# Altium PCB Source_Selector_V3.PcbDoc
Units mm, origin at the board's own origin, x right, y up, seen from the top; angles counter-clockwise.
Board outline 86.21 x 38.86 mm, 4 copper layers (Top Layer, GND, Signal, Bottom Layer), stack 1.954 mm thick; 67 components, 43 nets, 219 pads, 36 vias.
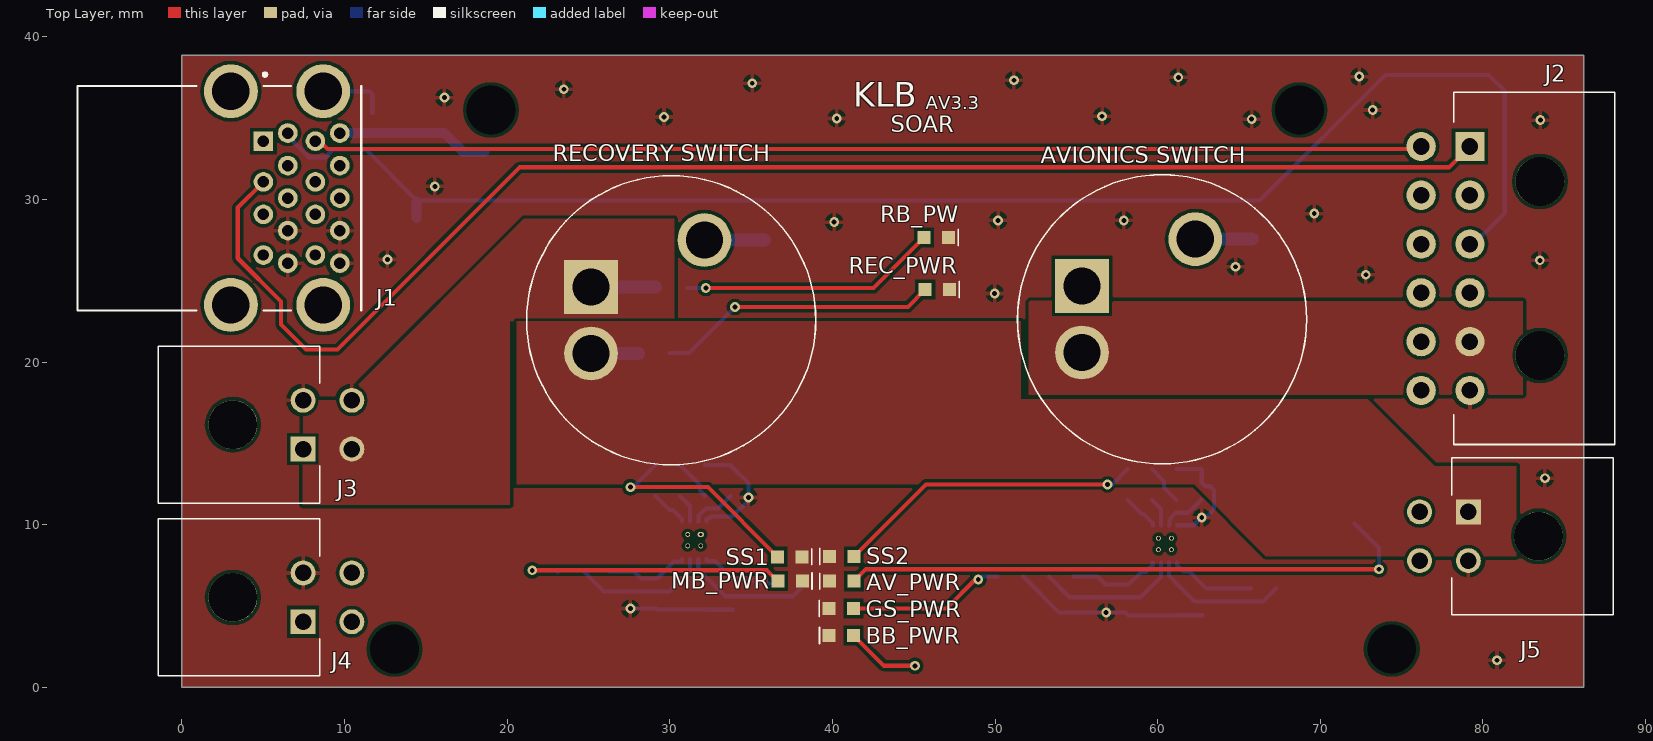
[diagram p0: Top Layer view]
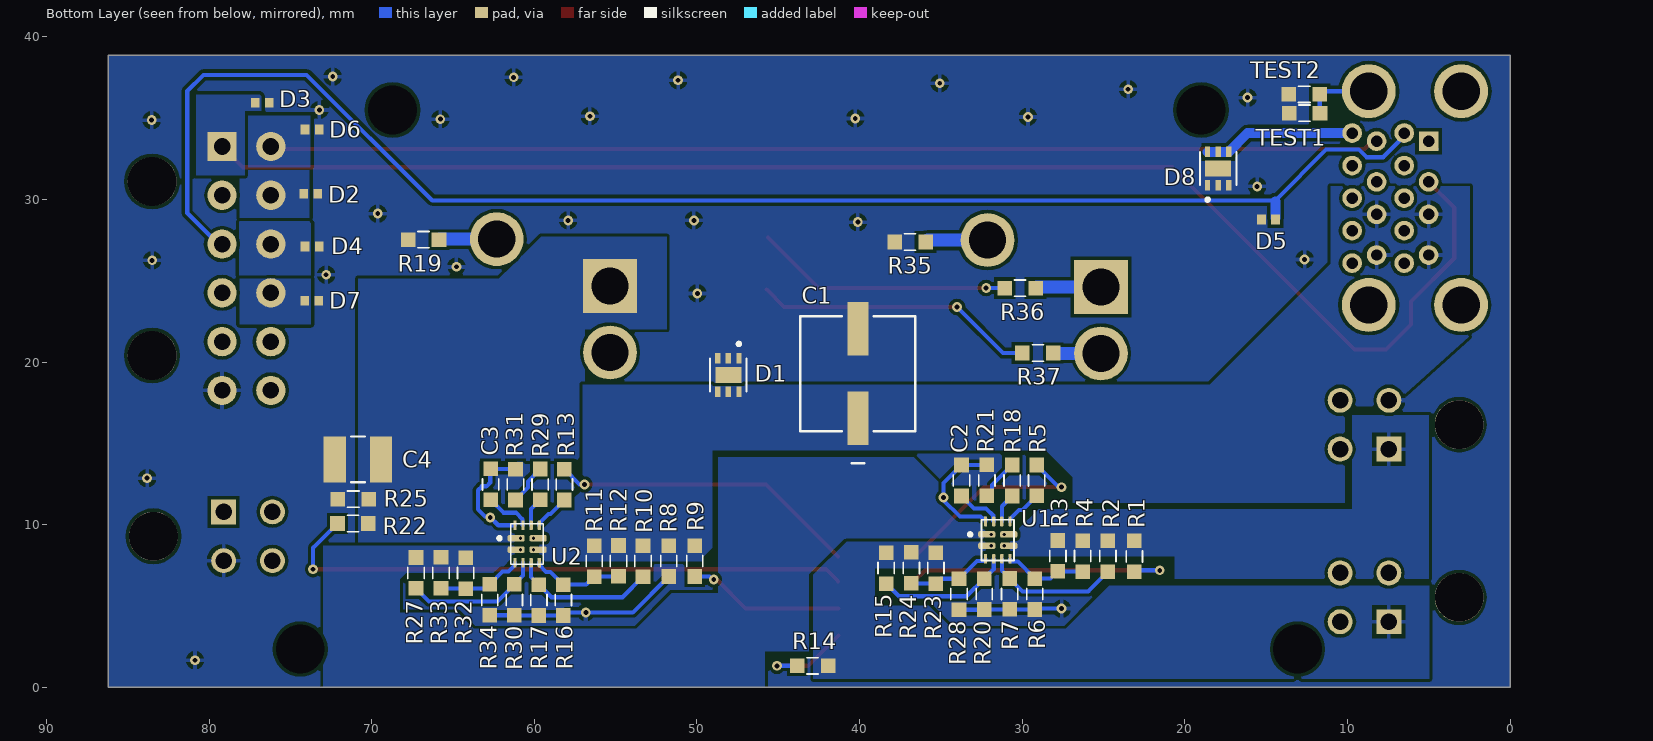
[diagram p1: Bottom Layer view, seen from below]
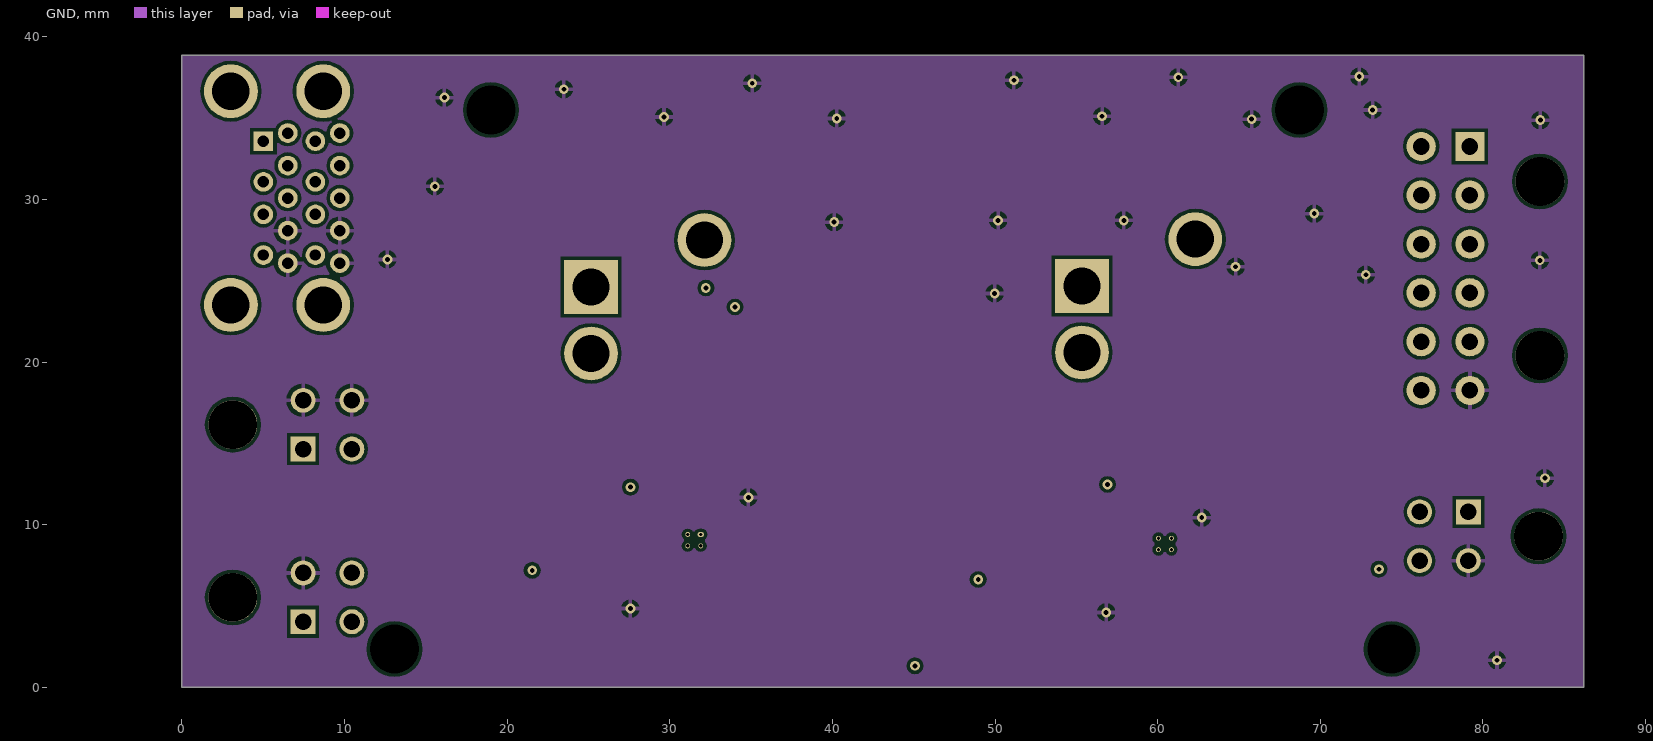
[diagram p2: GND]
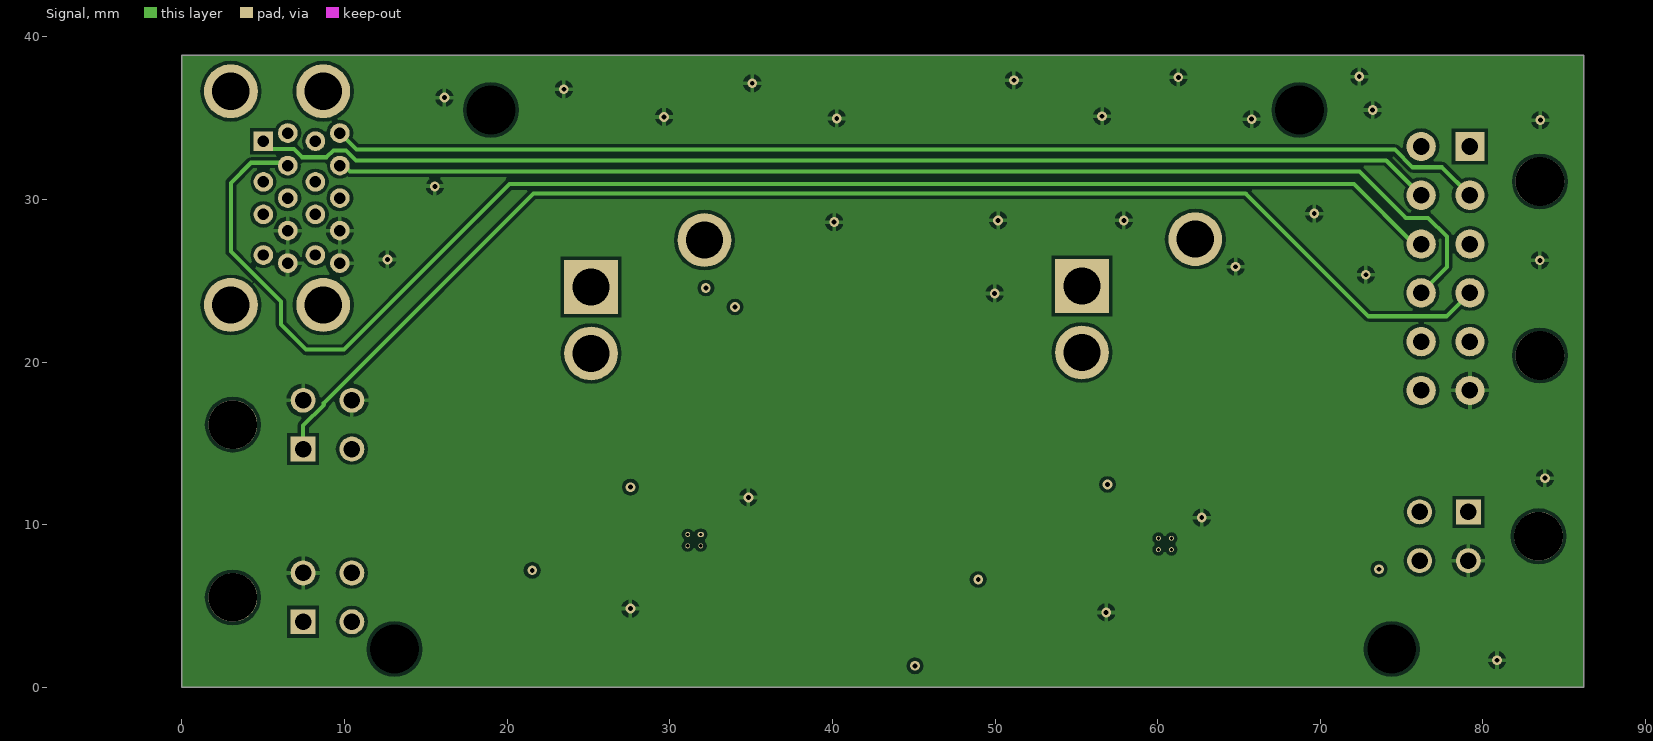
[diagram p3: Signal]
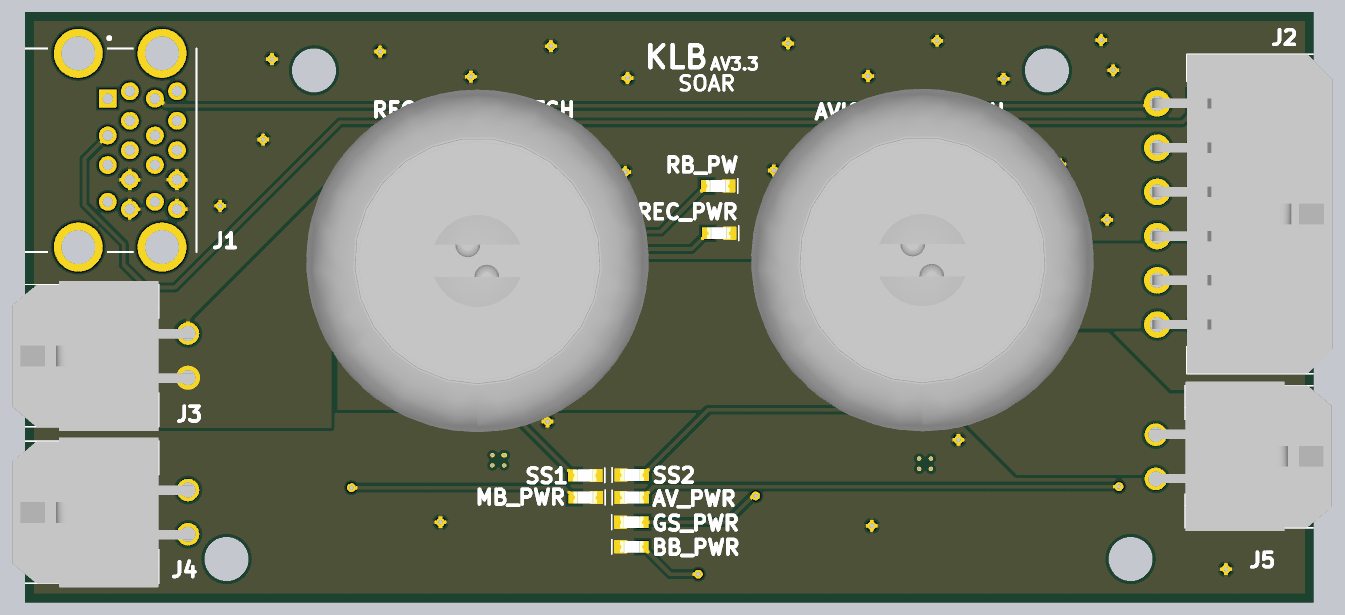
[diagram p4: 3D render of the assembled board from above, using the file's embedded part models]
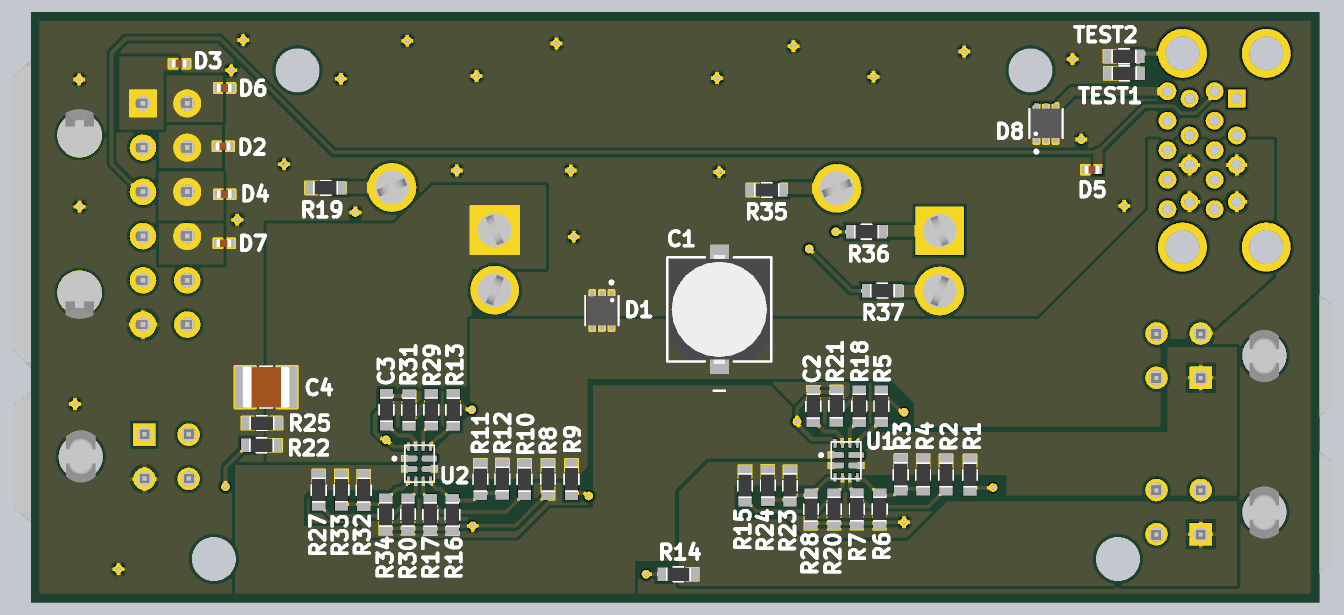
[diagram p5: 3D render of the assembled board from below, using the file's embedded part models]

## Layer stack, top to bottom
Top Solder: solder mask 0.01, Solder Resist, Dk 3.5
Top Layer: signal copper 0.071
Dielectric 2: prepreg 0.071, PP-006, Dk 4.1
GND: signal copper 0.035
Dielectric 1: dielectric 1.6, FR-4, Dk 4.8
Signal: signal copper 0.035
Dielectric 3: prepreg 0.071, PP-006, Dk 4.1
Bottom Layer: signal copper 0.071
Bottom Solder: solder mask 0.01, Solder Resist, Dk 3.5

## Board outline
0,0 0,38.862 86.208,38.862 86.208,0

## Design rules (kind name [scope] priority, off if disabled: settings)
Clearance [All] p1: gap=0.204 ignorepadtopadclearanceinfootprint=TRUE
DiffPairsRouting [All] p1: maxlimit=0.254 minlimit=0.254 mostfreqgap=0.254 toplayer_minwidth=0.381 toplayer_maxwidth=0.381 toplayer_prefwidth=0.381 midlayer1_minwidth=0.381 midlayer1_maxwidth=0.381 midlayer1_prefwidth=0.381 midlayer2_minwidth=0.381 midlayer2_maxwidth=0.381 midlayer2_prefwidth=0.381 bottomlayer_minwidth=0.381 bottomlayer_maxwidth=0.381 bottomlayer_prefwidth=0.381 substack1={DE8956C6-F9BE-4731-8523-C3B132525F0B} toplayer_{de8956c6-f9be-4731-8523-c3b132525f0b}_minwidth=0.381 toplayer_{de8956c6-f9be-4731-8523-c3b132525f0b}_maxwidth=0.381 toplayer_{de8956c6-f9be-4731-8523-c3b132525f0b}_prefwidth=0.381 midlayer1_{de8956c6-f9be-4731-8523-c3b132525f0b}_minwidth=0.381 midlayer1_{de8956c6-f9be-4731-8523-c3b132525f0b}_maxwidth=0.381 midlayer1_{de8956c6-f9be-4731-8523-c3b132525f0b}_prefwidth=0.381 midlayer2_{de8956c6-f9be-4731-8523-c3b132525f0b}_minwidth=0.381 midlayer2_{de8956c6-f9be-4731-8523-c3b132525f0b}_maxwidth=0.381 midlayer2_{de8956c6-f9be-4731-8523-c3b132525f0b}_prefwidth=0.381 bottomlayer_{de8956c6-f9be-4731-8523-c3b132525f0b}_minwidth=0.381 bottomlayer_{de8956c6-f9be-4731-8523-c3b132525f0b}_maxwidth=0.381 bottomlayer_{de8956c6-f9be-4731-8523-c3b132525f0b}_prefwidth=0.381 maxuncoupledlength=12.7
Height [All] p1: minheight=0 maxheight=40 prefheight=4
PolygonConnect [All] p1: thpad.connectstyle=Relief thpad.reliefconductorwidth=0.254 thpad.reliefentries=4 thpad.polygonreliefangle="90 Angle" thpad.airgapwidth=0.254 smdpad.connectstyle=Direct smdpad.reliefconductorwidth=0.254 smdpad.reliefentries=4 smdpad.polygonreliefangle="90 Angle" smdpad.airgapwidth=0.254 via.connectstyle=Relief via.reliefconductorwidth=0.254 via.reliefentries=4 via.polygonreliefangle="90 Angle" via.airgapwidth=0.254
RoutingVias [All] p1: holewidth=0.711 width=1.27 viastyle="Through Hole" minholewidth=0.711 minwidth=1.27 maxholewidth=0.711 maxwidth=1.27
SolderMaskExpansion [All] p1: expansion=0.102 istentingtop=FALSE
Width [All] p1: maxlimit=1 minlimit=0.204 preferedwidth=0.254 substack1={DE8956C6-F9BE-4731-8523-C3B132525F0B} toplayer_{de8956c6-f9be-4731-8523-c3b132525f0b}_minwidth=0.15 toplayer_{de8956c6-f9be-4731-8523-c3b132525f0b}_maxwidth=0.254 midlayer1_{de8956c6-f9be-4731-8523-c3b132525f0b}_minwidth=0.15 midlayer1_{de8956c6-f9be-4731-8523-c3b132525f0b}_maxwidth=0.254 midlayer2_{de8956c6-f9be-4731-8523-c3b132525f0b}_minwidth=0.15 midlayer2_{de8956c6-f9be-4731-8523-c3b132525f0b}_maxwidth=0.254 bottomlayer_{de8956c6-f9be-4731-8523-c3b132525f0b}_minwidth=0.15 bottomlayer_{de8956c6-f9be-4731-8523-c3b132525f0b}_maxwidth=0.254
28 further rules are at their usual default settings.

## Classes and differential pairs
component class Source_Selector: J1 J2 J3 J4 J5

## Components (designator, comment, footprint, x,y, rotation, side; value= is the part's Value field where it differs from the comment)
AV_PWR "LTST-C191KGKT" LTST-C191KGKT 40.569,6.525 r0 top
"AVIONICS SWITCH" "Y101132C203NQ" Y101132C203NQ 60.27,22.631 r0 top (schematic designator SW1)
BB_PWR "LTST-C191KGKT" LTST-C191KGKT 40.551,3.185 r0 top
C1 "UZG1E330MCL1GB" PCAP_6.3x3-ELECT_NCA-M 40.107,19.286 r90 bottom
C2 "04025A101JAT2A" 0603[1608] 33.733,12.717 r270 bottom
C3 "04025A101JAT2A" 0603[1608] 62.688,12.484 r270 bottom
C4 "EMK325ABJ107MM-P" CAPC3225X280N 70.846,14.011 r180 bottom
D1 "TVS1800DRVR" TVS1800DRVR 48.069,19.205 r270 bottom
D2 "D15V0H1U2LP-7B" 04025A101JAT2A 73.748,30.348 r180 bottom
D3 "D15V0H1U2LP-7B" 04025A101JAT2A 76.728,35.95 r180 bottom
D4 "D15V0H1U2LP-7B" 04025A101JAT2A 73.66,27.1 r180 bottom
D5 "D15V0H1U2LP-7B" 04025A101JAT2A 14.851,28.762 r0 bottom
D6 "D15V0H1U2LP-7B" 04025A101JAT2A 73.66,34.305 r180 bottom
D7 "D15V0H1U2LP-7B" 04025A101JAT2A 73.684,23.771 r180 bottom
D8 "TVS1800DRVR" TVS1800DRVR 17.949,31.9 r90 bottom
GS_PWR "LTST-C191KGKT" LTST-C191KGKT 40.541,4.854 r0 top
J1 "0484060003" MOLEX_0484060003 6.359,30.082 r270 top
J2 "10132449-1221GLF" 10132449-1221GLF 79.849,25.757 r90 top
J3 "0430450400" 0430450400 6.792,16.15 r270 top
J4 "0430450400" 0430450400 6.792,5.533 r270 top
J5 "0430450400" 0430450400 79.763,9.289 r90 top
MB_PWR "LTST-C191KGKT" LTST-C191KGKT 37.396,6.528 r180 top
R1 "ERA-3AEB2491V" 0603[1608] 23.106,8.057 r90 bottom
R2 "RMCF0603FT29K4" 0603[1608] 24.73,8.064 r90 bottom
R3 "RNCF0603BTC20K0" 0603[1608] 27.806,8.079 r90 bottom
R4 "RMCF0603FT665K" 0603[1608] 26.282,8.064 r90 bottom
R5 "CRGCQ0603F180R" 0603[1608] 29.115,12.72 r270 bottom
R6 "RT0603BRD075K11L" 0603[1608] 29.229,5.735 r90 bottom
R7 "RQ73C1J2K1BTD" 0603[1608] 30.776,5.745 r90 bottom
R8 "RT0603BRD0724KL" 0603[1608] 51.732,7.765 r90 bottom
R9 "ERA-3AEB2491V" 0603[1608] 50.135,7.765 r90 bottom
R10 "RMCF0603FT29K4" 0603[1608] 53.315,7.759 r90 bottom
R11 "RNCF0603BTC20K0" 0603[1608] 56.315,7.759 r90 bottom
R12 "RMCF0603FT665K" 0603[1608] 54.822,7.774 r90 bottom
R13 "CRGCQ0603F180R" 0603[1608] 58.154,12.471 r270 bottom
R14 "ERA-3AEB2491V" 0603[1608] 42.885,1.323 r180 bottom
R15 "RMCF0603FT29K4" 0603[1608] 38.364,7.328 r90 bottom
R16 "RT0603BRD075K11L" 0603[1608] 58.213,5.369 r90 bottom
R17 "RQ73C1J2K1BTD" 0603[1608] 59.717,5.369 r90 bottom
R18 "RT0603BRE0718KL" 0603[1608] 30.619,12.717 r270 bottom
R19 "CPF0603B510KE1" 0603[1608] 66.812,27.529 r180 bottom
R20 "RQ73C1J2K1BTD" 0603[1608] 32.33,5.732 r90 bottom
R21 "RT0603BRD075K11L" 0603[1608] 32.176,12.732 r270 bottom
R22 "ERA-3AEB2491V" 0603[1608] 71.156,10.076 r180 bottom
R23 "RT0603BRD0724KL" 0603[1608] 35.304,7.33 r90 bottom
R24 "CPF0603B510KE1" 0603[1608] 36.813,7.348 r90 bottom
R25 "RT0603BRD0724KL" 0603[1608] 71.133,11.572 r180 bottom
R27 "RMCF0603FT29K4" 0603[1608] 67.274,7.033 r90 bottom
R28 "RT0603BRD075K11L" 0603[1608] 33.89,5.725 r90 bottom
R29 "RT0603BRE0718KL" 0603[1608] 59.64,12.476 r270 bottom
R30 "RQ73C1J2K1BTD" 0603[1608] 61.228,5.384 r90 bottom
R31 "RT0603BRD075K11L" 0603[1608] 61.157,12.468 r270 bottom
R32 "RT0603BRD0724KL" 0603[1608] 64.225,7.017 r90 bottom
R33 "CPF0603B510KE1" 0603[1608] 65.741,7.042 r90 bottom
R34 "RT0603BRD075K11L" 0603[1608] 62.737,5.384 r90 bottom
R35 "CPF0603B510KE1" 0603[1608] 36.888,27.386 r180 bottom
R36 "MCT06030C1301FP500" 0603[1608] 30.124,24.547 r180 bottom
R37 "MCT06030C1301FP500" 0603[1608] 29.042,20.559 r180 bottom
RB_PW "LTST-C191KGKT" LTST-C191KGKT 46.383,27.663 r180 top
REC_PWR "LTST-C191KGKT" LTST-C191KGKT 46.454,24.453 r180 top
"RECOVERY SWITCH" "Y101132C203NQ" Y101132C203NQ 30.087,22.573 r0 top (schematic designator SW2)
SS1 "LTST-C191KGKT" LTST-C191KGKT 37.376,8.026 r180 top
SS2 "LTST-C191KGKT" LTST-C191KGKT 40.569,8.054 r0 top
TEST1 "RQ73C1J2K1BTD" 0603[1608] 12.638,35.306 r180 bottom
TEST2 "RQ73C1J2K1BTD" 0603[1608] 12.657,36.461 r180 bottom
U1 "TPS2121RUXR" IC_TPS2121RUXR#1 31.502,9.049 r180 bottom
U2 "TPS2121RUXR" IC_TPS2121RUXR#2 60.443,8.816 r180 bottom

## Footprints (in the part's own frame and the unit in brackets; to place one, negate y for a bottom-side part, rotate by r counter-clockwise, add the part's x,y. Pads: shape width x height; smd on the part's side, far side on the other; paste and mask are expansions set on the pad)
0603[1608] [mm]
  rect 0.9x0.9 smd mask+0.05: 1(-0.95,0) 2(0.95,0)
  silkscreen extent -0.35,-0.5 0.35,0.5, body extent -0.85,-0.45 0.85,0.45, height 0.55
04025A101JAT2A [mm]
  rect 0.54x0.6 smd: 1(-0.432,0) 2(0.432,0)
  body extent -0.53,-0.27 0.47,0.28, height 0.48
10132449-1221GLF [mm] "CONN HEADER R/A 12POS 3MM"
  rect 1.8x1.8 hole 1.02 mask+0.05: 1(7.5,0.65)
  round 1.8 hole 1.02 mask+0.05: 2(7.5,3.65) 3(4.5,0.65) 4(4.5,3.65) 5(1.5,0.65) 6(1.5,3.65) 7(-1.5,0.65) 8(-1.5,3.65) 9(-4.5,0.65) 10(-4.5,3.65) 11(-7.5,0.65) 12(-7.5,3.65)
  round 3 hole 3 mask+0.05: ""(-5.35,-3.65) ""(5.35,-3.65)
  silkscreen extent -10.82,-8.25 10.82,1.65, body extent -10.82,-8.25 10.83,3.97, height 8.78
0430450400 [mm] "4-Pin Molex 3.00mm Pitch"
  round 3 hole 3 unplated mask+0.05: 0(0,-3.66)
  rect 1.53x1.53 hole 1.02 mask+0.05: 1(1.5,0.66)
  round 1.53 hole 1.02 mask+0.05: 2(-1.5,0.66) 3(1.5,3.66) 4(-1.5,3.66)
  silkscreen extent -4.82,-8.25 4.83,1.67, body extent -5.05,-8.25 5.1,3.99, height 8.83
CAPC3225X280N [mm]
  rect 1.37x2.81 smd: 1(-1.42,0) 2(1.42,0)
  silkscreen extent -0.42,-1.4 0.42,1.4, body extent -1.6,-1.4 1.6,1.4, height 2.5
IC_TPS2121RUXR#1 [mm]
  rrect50% 1.05x0.4 smd mask+0: 1(-0.675,0.35) 2(-0.675,-0.35) 7(0.675,-0.35) 8(0.675,0.35)
  oval 0.4x0.3 hole 0.2 mask+0: 1_1(-0.4,0.35)
  round 0.3 hole 0.2 mask+0: 2_1(-0.4,-0.35) 7_1(0.4,-0.35) 8_1(0.4,0.35)
  rrect50% 0.2x0.6 smd mask+0: 3(-0.75,-1.15) 4(-0.25,-1.15) 5(0.25,-1.15) 6(0.75,-1.15) 9(0.75,1.15) 10(0.25,1.15) 11(-0.25,1.15) 12(-0.75,1.15)
  silkscreen extent -1.8,-1.25 1,1.25, body extent -1,-1.25 1,1.25, height 1
IC_TPS2121RUXR#2 [mm]
  rrect50% 1.05x0.4 smd mask+0: 1(-0.675,0.35) 2(-0.675,-0.35) 7(0.675,-0.35) 8(0.675,0.35)
  round 0.3 hole 0.2 mask+0: 1_1(-0.4,0.35) 2_1(-0.4,-0.35) 7_1(0.4,-0.35) 8_1(0.4,0.35)
  rrect50% 0.2x0.6 smd mask+0: 3(-0.75,-1.15) 4(-0.25,-1.15) 5(0.25,-1.15) 6(0.75,-1.15) 9(0.75,1.15) 10(0.25,1.15) 11(-0.25,1.15) 12(-0.75,1.15)
  silkscreen extent -1.8,-1.25 1,1.25, body extent -1,-1.25 1,1.25, height 1
LTST-C191KGKT [mm] "Green 571nm LED Indication - Discrete 2V 0603"
  rect 0.8x0.8 smd paste-3 mask+0.05: 1(-0.75,0) 2(0.75,0)
  silkscreen extent -1.35,-0.5 -1.35,0.5, body extent -0.8,-0.4 0.8,0.4, height 0.8
MOLEX_0484060003 [mm]
  rect 1.208x1.208 hole 0.7: 1(-3.5,-1.35)
  round 1.208 hole 0.7: 2(-1,-1.35) 3(1,-1.35) 4(3.5,-1.35) 5(4,0.15) 6(2,0.15) 7(0,0.15) 8(-2,0.15) 9(-4,0.15) 10(-3.5,1.85) 11(-1,1.85) 12(1,1.85) 13(3.5,1.85) 14(4,3.35) 15(2,3.35) 16(0,3.35) 17(-2,3.35) 18(-4,3.35)
  round 3.316 hole 2.3: S1(-6.57,-3.35) S2(6.57,-3.35) S3(6.57,2.33) S4(-6.57,2.33)
  silkscreen extent -7.7,-12.79 6.9,4.67, body extent -7.25,-12.75 7.25,4.75, height 15.8
PCAP_6.3x3-ELECT_NCA-M [mm]
  rect 3.291x1.287 smd paste+0 mask+0: 1(-2.75,0) 2(2.75,0)
  silkscreen extent -5.51,-3.53 3.53,3.53, body extent -3.7,-3.4 3.7,3.4, height 3.25
TVS1800DRVR [mm]
  rect 0.66x0.32 smd: 1(-1.025,0.65) 2(-1.025,0) 3(-1.025,-0.65) 4(1.025,-0.65) 5(1.025,0) 6(1.025,0.65)
  rect 1x1.6 smd paste-2: 7(0,0)
  silkscreen extent -2.01,-1.13 1,1.13, body extent -1,-1 1,1, height 0.8
Y101132C203NQ [mil] "SWITCH KEYLOCK 2POS SPDT 4A 125V"
  rect 130x130 hole 90 mask+1.97: 1(-194.01,80.36)
  round 130 hole 90 mask+1.97: 3(80.36,194.01) 8(-194.01,-80.36)
  silkscreen extent -350,-350 350,350, body extent -457,-457 457,458, height 1148

## Part data
AV_PWR BB_PWR GS_PWR MB_PWR RB_PW REC_PWR SS1 SS2: "LED GREEN CLEAR SMD 0603", Colour=Green, Current - Test=20mA, Lens Color=Colourless, Manufacturer="Lite-On Inc.", Millicandela Rating=35mcd, Package / Case="0603 (1608 Metric)", Supplier Part Number 1=160-1446-1-ND, Voltage - Forward (Vf) (Typ)=2V, ComponentLink1Description=Datasheet, ComponentLink1URL=http://optoelectronics.liteon.com/upload/download/DS22-2000-228/LTST-C191KGKT.PDF, Height (Max)=0.65mm, Lens Size="1.10mm x 0.80mm", Lens Style="Rectangle with Flat Top", Lens Transparency=Clear, Manufacturer Part Number=LTST-C191KGKT, Mounting Type="Surface Mount", Size / Dimension="1.60mm L x 0.80mm W", Supplier 1=Digi-Key, Viewing Angle=130°, Wavelength - Dominant=571nm, Wavelength - Peak=574nm
"AVIONICS SWITCH" "RECOVERY SWITCH": "SWITCH KEYLOCK 2POS SPDT 4A 125V", Current Rating (Amps)="4A (AC/DC)", Manufacturer=C&K, Supplier Part Number 1=CKN11517-ND, Voltage Rating - AC=125V, Voltage Rating - DC=28V, Actuator Type="Flat Key", Angle of Throw=90°, Circuit=SPDT, ComponentLink1Description=Datasheet, ComponentLink1URL=https://dznh3ojzb2azq.cloudfront.net/products/Switchlock/Y/documents/datasheet.pdf, Contact Finish=Silver, Contact Material=Copper, Contact Timing="Not Specified", Depth Behind Flange=28.83mm, Electrical Life="10,000 Cycles", Key Removable Positions="1 only", Manufacturer Part Number=Y101132C203NQ, Mounting Type="Panel Mount", Number of Positions=2, Panel Cutout Dimensions="Circular - 19.30mm Dia", Supplier 1=Digi-Key, Switch Function=On-On, Termination Style="Solder Lug"
C1: "CAP ALUM 33UF 20% 25V SMD", Capacitance=33µF, Lifetime @ Temp.="1000 Hrs @ 105°C", Manufacturer=Nichicon, Operating Temp.="-40°C ~ 105°C", Ripple Current @ High Frequency="63mA @ 10kHz", Ripple Current @ Low Frequency="42mA @ 120Hz", Tolernace=±20%, Voltage=25V, Manufacturer_Part_Number=UZG1E330MCL1GB
C2 C3: "CAP CER 100PF 50V C0G/NP0 0402", Capacitance=100pF, Manufacturer="AVX Corporation", Operating Temperature="-55°C ~ 125°C", Package / Case="0402 (1005 Metric)", Supplier Part Number 1=478-1082-1-ND, Temperature Coefficient="C0G, NP0", Tolerance=±5%, Voltage - Rated=50V, ComponentLink1Description=Datasheet, ComponentLink1URL=http://datasheets.avx.com/C0GNP0-Dielectric.pdf, Manufacturer Part Number=04025A101JAT2A, Mounting Type="Surface Mount, MLCC", Size / Dimension="0.039\" L x 0.020\" W (1.00mm x 0.50mm)", Supplier 1=Digi-Key, Thickness (Max)="0.022\" (0.56mm)"
C4: "CAP CER 100UF 16V X5R 1210", Capacitance=100µF, Manufacturer="Taiyo Yuden", Operating Temperature="-55°C ~ 85°C", Package / Case="1210 (3225 Metric)", Supplier Part Number 1=587-5426-1-ND, Temperature Coefficient=X5R, Tolerance=±20%, Voltage - Rated=16V, ComponentLink1Description=Datasheet, ComponentLink1URL=https://ds.yuden.co.jp/TYCOMPAS/ut/detail?pn=EMK325ABJ107MM-P%20&u=M, Manufacturer Part Number=EMK325ABJ107MM-P, Mounting Type="Surface Mount, MLCC", Size / Dimension="0.126\"\" L x 0.098\"\" W (3.20mm x 2.50mm)", Supplier 1=Digi-Key, Thickness (Max)="0.110\"\" (2.80mm)"
D1 D8: "UNIDIR PRECISION SURGE DIODE", Voltage - Clamping=24.7V, Manufacturer ID=TVS1800DRVR, Mounting Type="Surface Mount"
D2 D3 D4 D5 D6 D7: "TVS DIODE 15VWM 27VC DFN1006-2", Manufacturer="Diodes Incorporated", Supplier Part Number 1=D15V0H1U2LP-7BDICT-ND, ComponentLink1Description=Datasheet, ComponentLink1URL=http://optoelectronics.liteon.com/upload/download/DS22-2000-228/LTST-C191KGKT.PDF, Manufacturer Part Number=D15V0H1U2LP-7B, Supplier 1=Digi-Key
J1: "USB-A _USB TYPE-A_, Stacked USB 3.0 _USB 3.1 Gen 1, Superspeed_ Receptacle Connector 18 Position Through Hole, Right Angle", Package=None, Availability=Unavailable, MF=Molex, MP=0484060003, Price=None, SnapEDA_Link=https://www.snapeda.com/parts/0484060003/Molex/view-part/424547/?ref=snap
J2: "CONN HEADER R/A 12POS 3MM", Insulation Color=Black, Manufacturer="Amphenol ICC (FCI)", Material Flammability Rating="UL94 V-0", Operating Temperature="-40°C ~ 105°C", Supplier Part Number 1=609-5289-ND, Voltage Rating=250V, ComponentLink1Description=Datasheet, ComponentLink1URL=https://cdn.amphenol-icc.com/media/wysiwyg/files/documentation/datasheet/boardwiretoboard/bwb_minitekpwr3.0_hcc.pdf?__cf_chl_jschl_tk__=5b50c337d7977d3136f5a7e9c1a5138446a86722-1578191481-0-AdRe7fXYrldvOZ_oqyXIDS1Fw-yIkYCF-QCdaR8gv5bvudzwMePuF1OnY_qX9R1SRbUtnU8KyfMeQWvo-tgbYDs0UY0fEf2VYly7RnE44wN6RCRwe79pwwTkwB-vrp_E3FFt_m8Gv1l0VQgfDvqJJh9NWsFdXN6uiHYgEWJHQlxni9pgO_Rgu9b74Q_adNTuUPkDts4F_sjwuXFS2gwZ4qhDRVIbOsJk9z2IFwtIQbJe2Vjr12REDPUJnSIFI5L_m3PVR56FMV99EE0fexLx9E4Xzm8z4yXY4QuL_nxicuZLnFM8rKw84cv6VQDtrcv1h8b5URSWpnxkbKmN-6xqBT_N2gwuiomQytubllip4AB4QtXNO4uZy8p0Kaq8ZXDsS9f0XOGpGrNCvURFRCr5YrB2nakG2mZwStZMD_Rr-W-x1kEQ5VT0_Uar3vHfURsPPw, ComponentLink2Description=Drawing, ComponentLink2URL=https://cdn.amphenol-icc.com/media/wysiwyg/files/drawing/10132449.pdf?__cf_chl_jschl_tk__=3fb7538f61705fd3db72d6547b71e22025aaeae6-1578191484-0-ARZmBU2d2iTfwOyvkDW6juGvz8Wa7jPk-lPTAGC3bi6AwA2PAOw_83XbqimUoaj63c73oghkBl5EBlxfVnJt5FnKIy9_Ampqry6wpxN3P9yFfGzzu2bzrkjXc8H98cNGfE4yNZOx4lVYAc0DYF8iUgUBt3ot3PAqRWTuL_OE0dIKXvMd7u_4fU7igR1oB3QBFAu564mexcV1Dg4phJ9BA4kHFs6CIC10MmA2ZlPsaDWmfr6ivcYRarJOnVBN46Piz5s9Rafd2OkXuSIM4yJjlli4dKOItRDrJD3hRC0iA9RVgXipc9Ibd3Qny2RaW6xQiV-dovtBkpyFUGJQUyK5Difre6fQiv59Vrr2PfvD74WBgrERIBaIQ4JCRXFCC0XHSA, Contact Finish - Mating=Tin, Contact Finish - Post=Tin, Contact Length - Post="0.126\" (3.20mm)", Contact Material="Copper Alloy", Contact Shape=Square, Contact Type="Male Pin", Fastening Type="Locking Ramp", Features="Board Lock, Glow Wire Compliant", Insulation Height="0.343\" (8.71mm)", Insulation Material="Polyamide (PA9T), Nylon 9T", Manufacturer Part Number=10132449-1221GLF, Mounting Type="Through Hole, Right Angle", Number of Positions=12, Number of Positions Loaded=All, Number of Rows=2, Pitch - Mating="0.118\" (3.00mm)", Row Spacing - Mating="0.118\" (3.00mm)", Shrouding="Shrouded - 4 Wall", Style="Board to Cable/Wire", Supplier 1=Digi-Key, Termination=Solder
J3 J4 J5: "CONN HEADER R/A 4POS 3MM", Current Rating (Amps)=8A, Insulation Color=Black, Manufacturer=Molex, Material Flammability Rating="UL94 V-0", Supplier Part Number 1=WM1814-ND, Voltage Rating=600V, ComponentLink1Description=Datasheet, ComponentLink1URL=https://www.molex.com/pdm_docs/sd/430450400_sd.pdf, ComponentLink2Description="Product Specification", ComponentLink2URL=https://www.molex.com/pdm_docs/ps/PS-43045.pdf, Contact Finish - Mating=Tin, Contact Finish - Post=Tin, Contact Finish Thickness - Mating="100.0µin (2.54µm)", Contact Length - Post="0.125\" (3.18mm)", Contact Material=Brass, Contact Shape=Square, Contact Type="0.118\" (3.00mm)", Fastening Type="Locking Ramp", Features="Board Lock", Insulation Height="0.290\" (7.37mm)", Insulation Material="Liquid Crystal Polymer (LCP), Glass Filled", Manufacturer Part Number=0430450400, Mounting Type="Through Hole, Right Angle", Number of Positions=4, Number of Rows=2, Row Spacing - Mating="0.118\" (3.00mm)", Shrouding="Shrouded - 4 Wall", Supplier 1=Digi-Key, Termination=Solder
R1 R9 R14 R22: "RES SMD 2.49KOHM 0.1% 1/10W 0603", Manufacturer="Panasonic Electronic Components", Operating Temperature="-55°C ~ 155°C", Package="0603 (1608 Metric)", Power  (W)=0.1W, Resistance=2.49K, Supplier Part Number 1=P2.49KDBCT-ND, Temperature Coefficient=±25ppm/°C, Tolerance=±0.1%, ComponentLink1Description=Datasheet, ComponentLink1URL=https://industrial.panasonic.com/cdbs/www-data/pdf/RDM0000/AOA0000C307.pdf, Composition="Thin Film", Manufacturer Part Number=ERA-3AEB2491V, Supplier 1=Digi-Key
R2 R10 R15 R27: "RES 29.4K OHM 1% 1/10W 0603", Manufacturer="Stackpole Electronics Inc", Operating Temperature="-55°C ~ 155°C", Package="0603 (1608 Metric)", Power  (W)=0.1W, Resistance=29.4K, Supplier Part Number 1=738-RMCF0603FT29K4CT-ND, Temperature Coefficient=±100ppm/°C, Tolerance=±1%, Composition="Thick Film", Manufacturer Part Number=RMCF0603FT29K4, Supplier 1=Digi-Key
R3 R11: "RES 20K OHM 0.1% 1/10W 0603", Manufacturer="Stackpole Electronics Inc", Operating Temperature="-55°C ~ 155°C", Package="0603 (1608 Metric)", Power  (W)=0.1W, Resistance=20K, Supplier Part Number 1=RNCF0603BTC20K0CT-ND, Temperature Coefficient=±50ppm/°C, Tolerance=±0.1%, ComponentLink1Description=Datasheet, ComponentLink1URL=https://www.seielect.com/catalog/sei-rncf.pdf, Composition="Thin Film", Manufacturer Part Number=RNCF0603BTC20K0, Supplier 1=Digi-Key
R4 R12: "RES 665K OHM 1% 1/10W 0603", Manufacturer="Stackpole Electronics Inc", Operating Temperature="-55°C ~ 155°C", Package="0603 (1608 Metric)", Power  (W)=0.1W, Resistance=665K, Supplier Part Number 1=RMCF0603FT665KCT-ND, Temperature Coefficient=±100ppm/°C, Tolerance=±1%, ComponentLink1Description=Datasheet, ComponentLink1URL=https://www.seielect.com/catalog/sei-rmcf_rmcp.pdf, Composition="Thick Film", Manufacturer Part Number=RMCF0603FT665K, Supplier 1=Digi-Key
R5 R13: "RES 180 OHM 1% 1/10W 0603", Manufacturer="TE Connectivity Passive Product", Operating Temperature="-55°C ~ 155°C", Package="0603 (1608 Metric)", Power  (W)=0.1W, Resistance=180, Supplier Part Number 1=A129679CT-ND, Temperature Coefficient=±50ppm/°C, Tolerance=±0.1%, ComponentLink1Description=Datasheet, ComponentLink1URL=https://www.yageo.com/upload/media/product/productsearch/datasheet/rchip/PYu-RT_1-to-0.01_RoHS_L_12.pdf, Composition="Thin Film", Manufacturer Part Number=CRGCQ0603F180R, Supplier 1=Digi-Key
R6 R16 R21 R28 R31 R34: "RES SMD 5.11KOHM 0.1% 1/10W 0603", Manufacturer=Yageo, Operating Temperature="-55°C ~ 155°C", Package="0603 (1608 Metric)", Power  (W)=0.1W, Resistance=5.11K, Supplier Part Number 1=YAG1695CT-ND, Temperature Coefficient=±25ppm/°C, Tolerance=±0.1%, ComponentLink1Description=Datasheet, ComponentLink1URL=https://www.yageo.com/upload/media/product/productsearch/datasheet/rchip/PYu-RT_1-to-0.01_RoHS_L_12.pdf, Composition="Thin Film", Manufacturer Part Number=RT0603BRD075K11L, Supplier 1=Digi-Key
R7 R17 R20 R30: "RES 2.1 KOHMS 0.1% 0.15W 0603", Manufacturer="TE Connectivity Passive Product", Operating Temperature="-55°C ~ 155°C", Package="0603 (1608 Metric)", Power  (W)=0.1W, Resistance=2.1K, Supplier Part Number 1=A140446TR-ND, Temperature Coefficient=±10ppm/°C, Tolerance=±0.1%, ComponentLink1Description=Datasheet, ComponentLink1URL=https://media.digikey.com/pdf/Data%20Sheets/Tyco%20Electronics%20P%20B%20PDFs/RQ73-0618%20v2.pdf, Composition="Thin Film", Manufacturer Part Number=RQ73C1J2K1BTD, Supplier 1=Digi-Key
R8 R23 R25 R32: "RES SMD 24K OHM 0.1% 1/10W 0603", Manufacturer=Yageo, Operating Temperature="-55°C ~ 155°C", Package="0603 (1608 Metric)", Power  (W)=0.1W, Resistance=24K, Supplier Part Number 1=YAG1600CT-ND, Temperature Coefficient=±25ppm/°C, Tolerance=±0.1%, ComponentLink1Description=Datasheet, ComponentLink1URL=https://www.yageo.com/upload/media/product/productsearch/datasheet/rchip/PYu-RT_1-to-0.01_RoHS_L_12.pdf, Composition="Thin Film", Manufacturer Part Number=RT0603BRD0724KL, Supplier 1=Digi-Key
R18 R29: "RES SMD 18K OHM 0.1% 1/10W 0603", Manufacturer=Yageo, Operating Temperature="-55°C ~ 155°C", Package="0603 (1608 Metric)", Power  (W)=0.1W, Resistance=18K, Supplier Part Number 1=YAG4641CT-ND, Temperature Coefficient=±50ppm/°C, Tolerance=±0.1%, ComponentLink1Description=Datasheet, ComponentLink1URL=https://www.yageo.com/upload/media/product/productsearch/datasheet/rchip/PYu-RT_1-to-0.01_RoHS_L_12.pdf, Composition="Thin Film", Manufacturer Part Number=RT0603BRE0718KL, Supplier 1=Digi-Key
R19 R24 R33 R35: "RES SMD 510K OHM 0.1% 1/16W 0603", Manufacturer="TE Connectivity Passive Product", Operating Temperature="-55°C ~ 155°C", Package="0603 (1608 Metric)", Power  (W)=1/16W, Resistance=510K, Supplier Part Number 1=A102291CT-ND, Temperature Coefficient=±25ppm/°C, Tolerance=±0.1%, ComponentLink1Description=Datasheet, ComponentLink1URL=https://www.te.com/commerce/DocumentDelivery/DDEController?Action=srchrtrv&DocNm=1773200&DocType=DS&DocLang=English, Composition="Thin Film", Manufacturer Part Number=CPF0603B510KE1, Supplier 1=Digi-Key
R36 R37: "RES SMD 1.3K OHM 1% 1/8W 0603", Manufacturer="Vishay Beyschlag", Operating Temperature="-55°C ~ 155°C", Package="0603 (1608 Metric)", Power  (W)=1/8W, Resistance=1.3K, Supplier Part Number 1=749-1605-1-ND, Temperature Coefficient=±50ppm/°C, Tolerance=±1%, ComponentLink1Description=Datasheet, ComponentLink1URL=http://www.vishay.com/docs/28705/mcx0x0xpro.pdf, Composition="Thin Film", Manufacturer Part Number=MCT06030C1301FP500, Supplier 1=Digi-Key
TEST1 TEST2: "RES 2.1 KOHMS 0.1% 0.15W 0603", Manufacturer="TE Connectivity Passive Product", Operating Temperature="-55°C ~ 155°C", Package="0603 (1608 Metric)", Power  (W)=0.1W, Temperature Coefficient=±10ppm/°C, Tolerance=±0.1%, ComponentLink1Description=Datasheet, ComponentLink1URL=https://media.digikey.com/pdf/Data%20Sheets/Tyco%20Electronics%20P%20B%20PDFs/RQ73-0618%20v2.pdf, Composition="Thin Film", Manufacturer Part Number=RQ73C1J2K1BTD, Supplier 1=Digi-Key
U1 U2: "PWR MGMT BATTERY MGMT", ComponentLink1Description=Datasheet, ComponentLink1URL=https://www.ti.com/general/docs/suppproductinfo.tsp?distId=10&gotoUrl=http%253A%252F%252Fwww.ti.com%252Flit%252Fgpn%252Ftps2120, Supplier 1="Arrow Electronics", Supplier Part Number 1=TPS2121RUXR

## Free pads (board coordinates)
  round 1.524 hole 3 unplated: 0(13.066,2.352) 0(19,35.5) 0(68.715,35.5) 0(74.392,2.352)

## Via types
v1: diameter 0.6, hole 0.3, Top Layer to Bottom Layer, 36 vias

## Nets (pads, with @x,y where several pads share a name; then routed paths per layer and width w, separated by ;. In a path a pad name is that pad's centre, name@x,y a point inside that pad or via, vN(x,y) a via of type N, cw(c..) or ccw(c..) an arc to the next point about the centre after c; other vN are vias at no path point)
"7V5 RECOVERY BAT": "RECOVERY SWITCH.1" J3.3 R36.2 | length 4.3
  Bottom Layer w0.254: J3.3 J3.3@10.688,14.65 ; R36.2@29.107,24.614 R36.2
  Bottom Layer w0.8: 25.159,24.614 R36.2@29.107,24.614
"12V Backup Bat": J4.1 R14.2 R15.2 R23.2 R24.2 U1.2
"12V Main Bat": J2.7 J3.1 R1.2 R2.2 R3.2 R4.2 U1.7 | length 82.9
  Signal w0.254: J3.1 7.452,16.1 8.725,17.373 8.725,17.473 21.622,30.37 65.411,30.37 72.966,22.815 77.757,22.815 J2.7
GND: AV_PWR.1 BB_PWR.1 C1.2 C2.1 C3.1 C4.1 D1.1 D1.2 D1.3 D1.7 D2.2 D3.2 D4.2 D5.2 D6.2 D7.2 D8.1 D8.2 D8.3 D8.7 GS_PWR.1 J1.5 J1.6 J1.14 J1.15 J2.11 J3.2 J3.4 J4.2 J5.2 MB_PWR.1 R6.1 R7.1 R8.1 R16.1 R17.1 R19.1 R20.1 R21.1 R25.1 R28.1 R30.1 R31.1 R34.1 R35.1 RB_PW.1 REC_PWR.1 SS1.1 SS2.1 TEST1.1 TEST2.1 U1.12 U2.12 | length 32.9
  Bottom Layer w0.254: v1(27.577,4.844) 29.17,4.844 R6.1 29.239,4.795 R7.1 30.789,4.782 R20.1 32.338,4.775 R28.1 ; R21.1 33.717,13.682 C2.1 33.839,13.561 34.834,12.566 v1(34.834,11.676) 34.834,11.5 33.836,10.502 32.555,10.502 32.425,10.372 32.279,10.372 32.252,10.345 U1.12 ; R8.1 53.944,4.602 v1(56.83,4.602) 58.03,4.602 R16.1 R17.1 61.213,4.419 R30.1 R34.1 ; R31.1 62.673,13.418 62.71,13.381 62.71,12.603 62.951,12.362 63.228,12.362 63.469,12.121 63.469,10.946 63.026,10.503 62.776,10.503 v1(62.71,10.437) 62.689,10.437 62.218,9.966 U2.12
  other v1: 80.863,1.667 83.809,12.861 49.976,24.218 72.798,25.371 64.791,25.864 83.499,26.257 12.635,26.308 40.107,28.606 50.185,28.712 57.919,28.712 69.626,29.13 15.553,30.803 83.527,34.879 65.776,34.935 40.264,34.981 29.645,35.073 56.583,35.119 73.218,35.5 16.142,36.262 23.485,36.774 35.069,37.142 51.158,37.326 61.271,37.51 72.396,37.555
"GS PROP1 12V": D2.1 J1.1 J2.4 | length 74.9
  GND w0.254: J1.1 J1.1@5.486,33.105
  Signal w0.254: J1.1 5.486,33.105 6.093,33.105 6.101,33.097 6.887,33.097 7.387,32.597 8.902,32.597 9.322,33.017 10.096,33.017 10.71,32.403 74.054,32.403 J2.4
  Bottom Layer w0.254: J1.1@4.532,33.105 J1.1 J1.1@5.486,33.105
"GS PROP2 12V": D4.1 J1.8 J2.6 | length 90.5
  Signal w0.254: J1.8@6.333,32.258 4.257,32.258 3.02,31.021 3.02,26.8 6.099,23.721 6.099,22.301 7.633,20.767 9.959,20.767 15.831,26.638 20.132,30.94 72.062,30.94 75.745,27.257 J2.6
  Bottom Layer w0.254: J1.8@6.333,32.258 J1.8
"GS PROP3 12V": D7.1 J1.17 J2.8 | length 74
  Signal w0.254: J1.17 9.967,32.082 10.34,31.709 72.41,31.709 75.255,28.865 76.632,28.865 77.782,27.714 77.782,25.84 J2.8
"LAUNCH 12V": D3.1 J1.2 J2.1 | length 89.6
  Top Layer w0.254: J1.2 3.434,29.507 3.434,26.386 6.099,23.721 6.099,22.301 7.633,20.767 9.561,20.767 20.77,31.976 77.918,31.976 J2.1
  Bottom Layer w0.254: J1.2@5.009,30.89 J1.2
NetAV_PWR_2: AV_PWR.2 R22.1 | length 36
  Top Layer w0.254: AV_PWR.2 42.058,7.264 v1(73.602,7.264)
  Bottom Layer w0.254: R22.1 73.602,8.58 v1(73.602,7.264)
NetBB_PWR_2: BB_PWR.2 R14.1 | length 5.8
  Top Layer w0.254: BB_PWR.2 43.163,1.323 v1(45.072,1.323)
  Bottom Layer w0.254: R14.1 v1(45.072,1.323)
NetC2_2: C2.2 U1.11 | length 2.8
  Bottom Layer w0.254: U1.11 31.779,10.226 31.779,10.565 32.215,11.001 32.967,11.001 C2.2
NetC3_2: C3.2 U2.11 | length 2.8
  Bottom Layer w0.254: U2.11 60.72,9.993 60.72,10.332 61.125,10.737 61.892,10.737 C3.2
NetC4_2: "AVIONICS SWITCH.1" C4.2 R22.2 R25.2 U2.1
NetGS_PWR_2: GS_PWR.2 R9.1 | length 9.7
  Top Layer w0.254: GS_PWR.2 47.003,4.854 48.782,6.633 v1(48.964,6.633)
  Bottom Layer w0.254: v1(48.964,6.633) 49.057,6.633 49.239,6.815 R9.1
NetJ1_S4: J1.S4 TEST1.2 TEST2.2 | length 4.3
  Bottom Layer w0.254: J1.S4 11.516,36.652 TEST2.2 11.707,35.325 TEST1.2
NetMB_PWR_2: MB_PWR.2 R1.1 | length 17
  Top Layer w0.254: v1(21.539,7.196) 35.978,7.196 MB_PWR.2
  Bottom Layer w0.254: v1(21.539,7.196) 23.017,7.196 R1.1
NetR2_1: R2.1 R7.2 U1.5 | length 8.3
  Bottom Layer w0.254: R2.1 25.941,5.904 29.985,5.904 R7.2 31.252,7.171 U1.5
NetR3_1: R3.1 R4.1 R6.2 U1.6 | length 5.2
  Bottom Layer w0.254: R4.1 27.791,7.114 R3.1 28.251,6.685 R6.2 30.271,7.726 30.725,7.726 30.752,7.753 U1.6
NetR5_1: R5.1 SS1.2 | length 12.9
  Top Layer w0.254: v1(27.577,12.309) 32.344,12.309 SS1.2
  Bottom Layer w0.254: v1(27.577,12.309) 27.643,12.375 27.82,12.375 R5.1
NetR5_2: R5.2 U1.9 | length 2.4
  Bottom Layer w0.254: R5.2 29.975,10.91 30.188,10.91 30.752,10.345 U1.9
NetR10_1: R10.1 R17.2 U2.5 | length 8.8
  Bottom Layer w0.254: R10.1 54.586,5.538 58.936,5.538 60.193,6.795 U2.5
NetR11_1: R11.1 R12.1 R16.2 U2.6 | length 5.7
  Bottom Layer w0.254: R12.1 56.3,6.824 R11.1 56.805,6.319 R16.2 58.994,7.1 59.273,7.1 59.693,7.52 U2.6
NetR13_1: R13.1 SS2.2 | length 19.1
  Top Layer w0.254: SS2.2 45.744,12.479 v1(56.911,12.479)
  Bottom Layer w0.254: v1(56.911,12.479) 57.212,12.479 R13.1
NetR13_2: R13.2 U2.9 | length 2.3
  Bottom Layer w0.254: R13.2 59.007,10.668 59.136,10.668 59.693,10.112 U2.9
NetR15_1: R15.1 R20.2 U1.4 | length 8.3
  Bottom Layer w0.254: U1.4 31.752,7.26 R20.2 33.413,5.599 37.585,5.599 R15.1
NetR18_1: R18.1 R21.2 | length 2.5
  Bottom Layer w0.254: R18.1 31.853,12.433 31.853,12.105 R21.2
NetR18_2: R18.2 U1.10 | length 1.8
  Bottom Layer w0.254: R18.2 31.252,11.133 U1.10
NetR19_2: "AVIONICS SWITCH.3" R19.2 | length 3.6
  Bottom Layer w0.254: R19.2@65.832,27.559 R19.2
  Bottom Layer w0.8: 62.311,27.559 R19.2@65.832,27.559
NetR23_1: R23.1 R24.1 R28.2 U1.3 | length 5.3
  Bottom Layer w0.254: U1.3 32.252,7.804 32.279,7.777 32.787,7.777 R28.2 35.01,6.675 R23.1 36.795,6.38 R24.1
NetR27_1: R27.1 R30.2 U2.4 | length 8.4
  Bottom Layer w0.254: U2.4 60.693,6.87 R30.2 62.276,5.286 66.478,5.286 R27.1
NetR27_2: R27.2 R32.2 R33.2 U1.1 U2.2
NetR29_1: R29.1 R31.2 | length 2.5
  Bottom Layer w0.254: R29.1 60.398,12.668 60.398,12.276 R31.2
NetR29_2: R29.2 U2.10 | length 1.8
  Bottom Layer w0.254: R29.2 60.193,10.973 U2.10
NetR32_1: R32.1 R33.1 R34.2 U2.3 | length 5.3
  Bottom Layer w0.254: U2.3 61.193,7.52 61.597,7.115 61.956,7.115 R34.2 63.004,6.067 R32.1 65.716,6.067 R33.1
NetR35_2: "RECOVERY SWITCH.3" R35.2 | length 3.9
  Bottom Layer w0.254: R35.2@35.824,27.501 R35.2
  Bottom Layer w0.8: 32.128,27.501 R35.2@35.824,27.501
NetR36_1: R36.1 RB_PW.2 | length 15.8
  Top Layer w0.254: v1(32.217,24.554) 42.524,24.554 RB_PW.2
  Bottom Layer w0.254: R36.1 31.082,24.554 v1(32.217,24.554)
NetR37_1: R37.1 REC_PWR.2 | length 17.3
  Top Layer w0.254: v1(34.011,23.391) 44.642,23.391 REC_PWR.2
  Bottom Layer w0.254: R37.1 31.178,20.559 v1(34.011,23.391)
"POWER 12V": C1.1 D1.4 D1.5 D1.6 J1.3 J1.4 J1.12 J1.13 R8.2 R9.2 R10.2 R11.2 R12.2 U2.7 | length 0.4
  Bottom Layer w0.254: J1.13@8.209,26.182 J1.13
"RECOVERY PWR": "RECOVERY SWITCH.8" J5.1 R37.2 | length 2.9
  Bottom Layer w0.254: R37.2@28.065,20.531 R37.2
  Bottom Layer w0.8: 25.159,20.531 R37.2@28.065,20.531
RX: D5.1 J1.9 J2.5 | length 92.8
  Signal w0.254: J1.9@6.251,34.34 J1.9@6.509,34.34 ; J1.9@6.256,34.082 J1.9 ; J2.5@79.107,27.165 J2.5
  Bottom Layer w0.254: J1.9 6.509,33.889 7.801,32.597 8.831,32.597 9.302,33.068 11.308,33.068 14.436,29.941 66.275,29.941 73.997,37.662 80.345,37.662 81.339,36.668 81.339,29.162 79.434,27.257 J2.5
  Bottom Layer w0.6: D5.1@14.431,28.853 14.431,29.892
"SOL CTRL 12V": D6.1 J1.10 J2.2 | length 68.7
  Top Layer w0.254: J1.10 8.467,33.582 8.952,33.097 76.039,33.097 J2.2
  GND w0.254: J1.10 J1.10@8.467,33.582 ; J2.2@76.036,33.094 J2.2
TX: D8.4 D8.5 D8.6 J1.18 J2.3 | length 80.5
  Top Layer w0.254: J1.18 J1.18@9.783,34.008
  Signal w0.254: J1.18 10.73,33.061 74.584,33.061 75.669,31.976 77.48,31.976 J2.3
  Bottom Layer w0.6: J1.18 16.142,34.082 D8.4 D8.5 D8.6
Vout: "AVIONICS SWITCH.8" J2.9
pads on no net: J1.7 J1.11 J1.16 J1.S1 J1.S2 J1.S3 J2. J2.10 J2.12 J3.0 J4.0 J4.3 J4.4 J5.0 J5.3 J5.4 U1.1_1 U1.2_1 U1.7_1 U1.8 U1.8_1 U2.1_1 U2.2_1 U2.7_1 U2.8 U2.8_1
copper on no net: | length 0
  Signal w0.254: 76.178,18.279 76.199,18.257

## Polygon pours and split planes (outlines as drawn)
GND on Bottom Layer "NONET_L-01_P-001" (solid, pour order 97): 0,0 0,38.862 86.208,38.862 86.208,0
"GS PROP1 12V" on Bottom Layer "NONET_L-01_P-001" (solid, pour order 94): 73.833,31.9 73.833,28.865 78.124,28.865 78.124,31.9
"GS PROP2 12V" on Bottom Layer "NONET_L-01_P-001" (solid, pour order 95): 73.746,28.865 73.746,25.333 78.143,25.333 78.143,28.865
"LAUNCH 12V" on Bottom Layer "NONET_L-01_P-001" (solid, pour order 92): 77.803,35.451 76.797,35.451 76.797,36.449 80.788,36.449 80.788,31.488 77.803,31.488
"GS PROP3 12V" on Bottom Layer "NONET_L-01_P-001" (solid, pour order 96): 73.746,25.175 73.746,22.324 78.115,22.324 78.115,25.333 73.746,25.333
"SOL CTRL 12V" on Bottom Layer "NONET_L-01_P-001" (solid, pour order 93): 73.774,35.154 77.6,35.154 77.6,31.995 73.774,31.995 73.774,33.126
NetR27_2 on Bottom Layer "NONET_L-01_P-001" (solid, pour order 87): 45.822,2.212 45.822,0 72.967,0 72.967,8.716 61.118,8.716 61.118,8.216 62.3,7.033 67.884,7.033 68.265,6.652 68.265,4.582 64.696,4.582 63.708,3.594 53.746,3.594 51.542,5.799 48.677,5.799 48.677,14.135 36.663,14.135 32.177,9.649 32.177,9.149 40.932,9.149 43.15,6.932 43.129,6.911 43.129,2.212
NetC4_2 on Bottom Layer "NONET_L-01_P-001" (solid, pour order 89): 62.172,25.123 70.83,25.123 70.83,8.916 61.118,8.916 61.118,9.416 63.388,11.686 63.388,13.934 57.467,13.934 57.454,13.921 56.901,14.474 56.901,22.027 51.869,22.027 51.869,27.711 59.583,27.711
"POWER 12V" on Bottom Layer "Power-POWER 12V" (solid, pour order 36): 57.031,14.575 57.031,12.153 59.768,9.416 59.768,8.216 59.317,7.765 49.635,7.765 49.635,7.993 49.052,8.575 49.052,14.575 28.555,14.575 26.906,12.926 26.906,11.346 10.168,11.346 10.168,17.272 7.33,17.272 2.479,21.609 2.479,30.803 11.026,30.803 11.026,26.06 18.468,18.618 57.031,18.618
"12V Backup Bat" on Bottom Layer "Power-12V Main Bat" (solid, pour order 32): 40.803,8.949 42.835,6.917 42.835,6.304 42.835,0.536 4.976,0.536 4.976,2.314 4.976,6.256 24.658,6.256 27.325,3.589 34.303,3.589 35.735,5.022 39.064,5.022 39.064,7.332 33.297,7.33 32.177,8.449 32.177,8.949
"12V Main Bat" on Bottom Layer "Power-12V Backup Bat" (solid, pour order 34): 20.627,8.057 20.627,6.667 4.999,6.667 4.999,16.741 5.243,16.741 9.7,16.741 9.7,10.96 28.997,10.96 30.827,9.129 30.827,8.449 30.435,8.057
no net on Bottom Layer "NONET_L04_P084" (solid, pour order 84): 2.615,0
GND on Top Layer "NONET_L-01_P-001" (solid, pour order 98): 0,0 0,38.862 86.208,38.862 86.208,0
"7V5 RECOVERY BAT" on Top Layer "NONET_L-01_P-001" (solid, pour order 90): 9.881,17.65 7.452,17.65 7.452,14.65 7.424,14.623 7.424,11.229 20.17,11.229 20.17,22.499 30.279,22.499 30.279,28.799 21.029,28.799
Vout on Top Layer "NONET_L-01_P-001" (solid, pour order 88): 52.085,23.756 52.085,17.988 82.446,17.988 82.446,23.741
"RECOVERY PWR" on Top Layer "Power-Stratologger Power" (solid, remove dead copper, pour order 30): 51.582,22.499 51.582,17.716 72.916,17.716 77.038,13.594 82.062,13.594 82.062,8.062 66.647,8.062 62.233,12.476 20.592,12.476 20.592,22.499
GND on Signal "NONET_L-01_P-001" (solid, pour order 99): 0,0 0,38.862 86.208,38.862 86.208,0
GND on GND "NONET_L-01_P-001" (solid, pour order 91): 0,0 0,38.862 86.208,38.862 86.208,0

## Silkscreen, mask and mechanical layers (free items; w line width, h text height)
Top Overlay:
  text "KLB" at 41.265,35.7 h1.5
  text "AV3.3" at 45.752,35.557 h0.8
  text "SOAR" at 43.578,34.142 h1
Board:
  the board outline again, w1.2